# EAGLE board schematic (EAGLE 9.1.0)

Size 160 x 100 mm. Coordinates in mm from the lower left corner, seen from the top.
Outline: 0,0 160,0 160,100 0,100 0,0
Copper layers (1*16): Top 0.035mm / dielectric 1.5mm / Bottom 0.035mm
Design rules "default": minimum track width 6mil, minimum drill 0.35mm, track to track 6mil, track to pad 6mil, pad to pad 6mil, via to via 6mil, smd to smd 6mil, copper to edge 40mil, drill to drill 6mil, minimum pad ring 10mil, minimum via ring 8mil, stop-mask expansion 4mil, vias tented up to drill 0mil, thermal gap 10mil

## Footprints (pad centres in the part's own frame; a part is rotated, then mirrored left to right if it is on the bottom)
LED_3MM = drill 0.813 pad 1.88: A -1.27,0; K 1.27,0
1X02_LOCK = drill 1.016 pad 1.88: 1 -0.178,0; 2 2.718,0
WIRELESS-NRF24L01 = drill 1 square: 1 -12.7,6.35 | drill 1: 2 -10.16,6.35; 3 -12.7,3.81; 4 -10.16,3.81; 5 -12.7,1.27; 6 -10.16,1.27; 7 -12.7,-1.27; 8 -10.16,-1.27
0207/10 = drill 0.813 octagon: 1 -5.08,0; 2 5.08,0
GY-521 = drill 0.8 pad 1.778 long: ADO -8.89,-6.35; GND -8.89,6.35; INT -8.89,-8.89; SCL -8.89,3.81; SDA -8.89,1.27; VCC -8.89,8.89; XCL -8.89,-3.81; XDA -8.89,-1.27
ABK-PRO-MINI = drill 0.8 long: A0 10.16,-3.81; A1 10.16,-6.35; A2 10.16,-8.89; A3 10.16,-11.43; A6 3.81,-21.59; A7 6.35,-21.59; D2 -5.08,-3.81; D3 -5.08,-6.35; D4 -5.08,-8.89; D5 -5.08,-11.43; D6 -5.08,-13.97; D7 -5.08,-16.51; D8 -5.08,-19.05; D9 -5.08,-21.59; D10 10.16,-21.59; D11 10.16,-19.05; D12 10.16,-16.51; D13 10.16,-13.97; DTR 8.89,8.89; GND 10.16,3.81; GND1 -5.08,-1.27; GND2 -3.81,8.89; GND3 -1.27,8.89; GND4 1.27,-21.59; RAW 10.16,6.35; RST 10.16,1.27; RST1 -5.08,1.27; RX1 -5.08,3.81; RX1-1 3.81,8.89; TX0 -5.08,6.35; TX0-1 6.35,8.89; VCC 10.16,-1.27; VCC1 1.27,8.89 | drill 0.8: A4 6.35,-5.08; A5 6.35,-2.54

## Placement (x,y rotation side)
D1  [LED_3MM]  -39.37,-33.02 0 top  (outside the outline)
J1  [1X02_LOCK]  -33.02,-24.13 0 top  (outside the outline)
J2  [1X02_LOCK]  -33.02,-27.94 0 top  (outside the outline)
J3  [1X02_LOCK]  -33.02,-31.75 0 top  (outside the outline)
J4  [1X02_LOCK]  -33.02,-35.56 0 top  (outside the outline)
M1  WIRELESS-NRF24L01  [WIRELESS-NRF24L01]  -20.32,-11.43 0 top  (outside the outline)
R1  [0207/10]  -35.56,-40.64 0 top  (outside the outline)
U1  GY-521MPU6050  [GY-521]  -5.08,11.43 0 top  (outside the outline)
U$1  ABK-PRO-MINI  [ABK-PRO-MINI]  -29.21,24.13 0 top  (outside the outline)

## Library data of the parts
D1 = SparkFun-LED; PROD_ID: DIO-08794
J1-J4 = SparkFun-Connectors
M1 = diy-modules
R1 = resistor
U1 = gy-521
U$1 = Arduino-clone

## Nets
GND: M1.1
VCC: M1.2